# Altium PCB USB2.0_HUB.PcbDoc (part 2 of 2)
Units mm, origin at the board's own origin, x right, y up, seen from the top; angles counter-clockwise.
Board outline 91.95 x 55.97 mm, 4 copper layers (Top Layer, Layer 1, Layer 2, Bottom Layer), stack 1.544 mm thick; 125 components, 88 nets, 457 pads, 299 vias.
Unrouted connection lines stored in the file: 120.
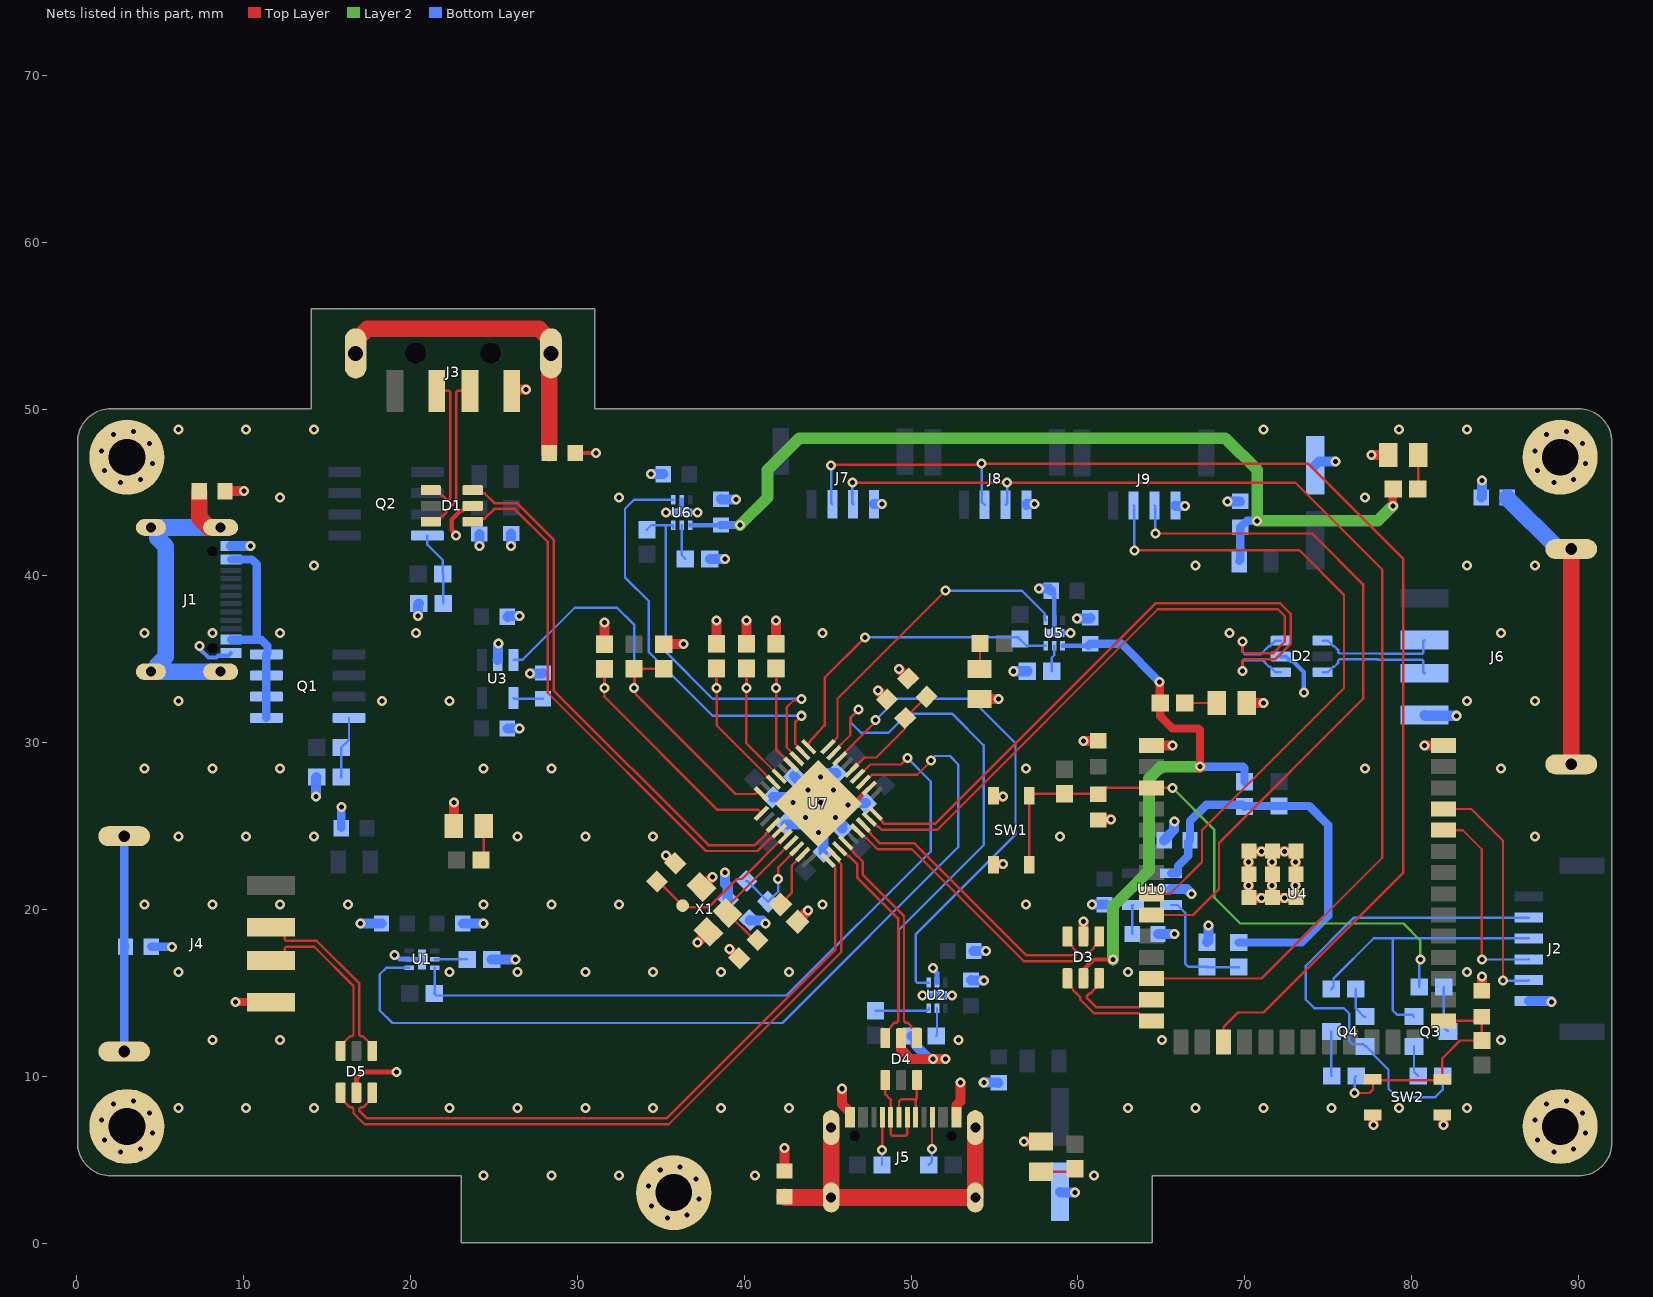
[diagram p4: the nets of this part, all layers, seen from the top]

## Via types
v1: diameter 0.6, hole 0.3, Top Layer to Bottom Layer, tented both sides, 259 vias
v2: diameter 0.6, hole 0.3, Top Layer to Bottom Layer, 40 vias

## Nets (pads, with @x,y where several pads share a name; then routed paths per layer and width w, separated by ;. In a path a pad name is that pad's centre, name@x,y a point inside that pad or via, vN(x,y) a via of type N, cw(c..) or ccw(c..) an arc to the next point about the centre after c; other vN are vias at no path point) (continued)
"+5V PORT3": C13.2 D3.5 R31.1 R45.2 U5.1 | length 35.1
  Top Layer w0.254: D3.5@60.37,15.935 60.37,16.428 60.96,17.018 v1(62.103,17.018)
  Top Layer w0.5: D3.5@60.325,15.89 D3.5@60.37,15.935 ; v1(64.897,33.655) 64.897,32.412 R45.2@64.924,32.385 64.924,31.596 65.659,30.861 67.226,30.861 67.31,30.777 v1@67.31,28.448
  Layer 2 w0.7: v1(62.103,17.018) 62.103,20.193 64.262,22.352 64.262,27.862 64.975,28.575 v1(67.31,28.575)
  Bottom Layer w0.254: U5.1@59.08,35.814 C13.2@60.62,35.814
  Bottom Layer w0.5: C13.2@60.62,35.814 C13.2@60.747,35.941 62.611,35.941 v1(64.897,33.655) ; v1(67.31,28.575) 69.893,28.575 69.977,28.491 R31.1@69.977,27.659
"+5V PORT4": C14.2 C34.2 FB2.1 R46.2 U6.1 | length 53.7
  Top Layer w0.5: v1(78.867,44.196) 78.867,45.185 R46.2@78.894,45.212
  Layer 2 w0.7: v1(39.751,43.053) 41.402,44.704 41.402,46.355 43.307,48.26 68.834,48.26 70.739,46.355 v1(70.739,43.307) 77.978,43.307 v1(78.867,44.196)
  Bottom Layer w0.254: U6.1@36.759,43.036 C14.2@38.591,43.036
  Bottom Layer w0.5: C14.2@38.591,43.036 C14.2@38.608,43.053 v1(39.751,43.053) ; FB2.1@69.657,40.894 69.723,40.96 C34.2@69.723,42.926 69.753,42.926 70.134,43.307 v1(70.739,43.307)
"+5V VBUS_EXT": J1.A4_B9 J1.B4_A9 Q1.5 Q1.6 Q1.7 Q1.8 | length 12.9
  Bottom Layer w0.5: J1.A4_B9@9.248,36.187 10.795,36.187 ; J1.B4_A9@9.248,40.987 10.502,40.987 10.795,40.694 10.795,36.187 ; Q1.5@11.368,31.496 Q1.6@11.368,32.766 Q1.7@11.368,34.036 Q1.8@11.368,35.306 11.43,35.368 11.43,35.814 11.057,36.187 10.795,36.187
BYP: C9.2 U3.4 | length 1.8
  Bottom Layer w0.143: U3.4@26.18,32.687 26.228,32.639 C9.2@27.94,32.639
"BYP ESP1": C40.2 U10.4 | length 1.8
  Bottom Layer w0.143: C40.2@63.246,18.542 63.246,20.231 U10.4@63.3,20.285
"EN ESP1": R34.1 R36.2 U10.3 | length 7.4
  Bottom Layer w0.143: U10.3@65.59,20.285 65.955,20.285 66.421,19.819 66.421,16.764 66.595,16.59 R36.2@67.732,16.59 67.759,16.563 R34.1@69.637,16.563
ESP1_DTR: J2.2 Q4.2 R16.2 | length 29.8
  Bottom Layer w0.143: Q4.2@77.214,11.811 77.087,11.938 76.454,11.938 76.263,12.129 76.263,13.78 75.946,14.097 74.168,14.097 73.66,14.605 73.66,16.637 76.551,19.528 J2.2@87.017,19.528 ; Q4.2@77.278,11.811 77.715,11.374 77.715,11.311 78.613,10.412 78.613,9.271 79.121,8.763 81.407,8.763 81.861,9.217 R16.2@81.861,10.033
ESP1_EN: C8.2 R3.1 R14.2 SW1.3 SW1.4 U4.3 | length 36.8
  Top Layer w0.143: SW1.3@57.082,22.69 SW1.4@57.082,26.84 57.193,26.951 R3.1@59.182,26.951 61.187,26.951 C8.2@61.214,26.924 61.595,27.305 U4.3@64.415,27.305 v1(65.659,27.305)
  Layer 2 w0.143: v1(65.659,27.305) 68.179,24.785 68.179,20.721 69.723,19.177 79.502,19.177 80.518,18.161 v1(80.518,17.018)
  Bottom Layer w0.143: R14.2@80.445,15.367 80.445,16.945 v1(80.518,17.018)
ESP1_IO0: C10.2 R9.1 R19.2 SW2.3 SW2.4 U4.27 | length 14.9
  Top Layer w0.143: v1(76.581,9.017) 77.47,9.017 77.681,9.228 SW2.4@77.681,9.838 77.919,9.838 77.978,9.779 81.772,9.779 SW2.3@81.831,9.838 81.831,11.092 82.904,12.165 R9.1@84.201,12.165 C10.2@84.201,13.589 83.947,13.335 U4.27@81.915,13.335
  Bottom Layer w0.143: v1(76.581,9.017) 76.581,9.933 R19.2@76.681,10.033
ESP1_RTS: J2.3 Q3.2 R18.2 | length 19.1
  Bottom Layer w0.143: R18.2@75.184,15.24 75.316,15.372 75.316,15.88 77.724,18.288 78.867,18.288 ; Q3.2@80.139,13.589 80.012,13.716 79.121,13.716 78.867,13.97 78.867,18.288 ; J2.3@87.017,18.278 87.007,18.288 78.867,18.288
ESP1_RX: J2.4 U4.36 | length 12.2
  Top Layer w0.143: U4.36@81.915,24.765 83.058,24.765 84.201,23.622 v1(84.201,17.018)
  Bottom Layer w0.143: v1(84.201,17.018) 87.007,17.018 J2.4@87.017,17.028
ESP1_SCL: J7.2 J8.2 U4.17 | length 75.9
  Top Layer w0.143: v1(45.212,46.609) 45.276,46.672 54.165,46.672 v1(54.229,46.736) 73.787,46.736 79.502,41.021 79.502,22.225 71.12,13.843 69.596,13.843 68.72,12.967 U4.17@68.72,12.085
  Bottom Layer w0.143: v1(45.212,46.609) 45.212,44.373 J7.2@45.283,44.302 ; v1(54.229,46.736) 54.229,44.442 J8.2@54.412,44.259
ESP1_SDA: J7.3 J8.3 U4.12 | length 70.7
  Top Layer w0.143: v1(46.482,45.593) v1(55.753,45.593) 73.025,45.593 78.232,40.386 78.232,23.114 70.993,15.875 U4.12@64.415,15.875
  Bottom Layer w0.143: v1(46.482,45.593) 46.482,44.353 J7.3@46.533,44.302 ; J8.3@55.662,44.259 55.753,44.351 v1(55.753,45.593)
ESP1_TX: J2.5 U4.37 | length 14.3
  Top Layer w0.143: U4.37@81.915,26.035 83.566,26.035 85.471,24.13 v1(85.471,15.748)
  Bottom Layer w0.143: v1(85.471,15.748) 86.987,15.748 J2.5@87.017,15.778
GND: C1.1 C2.1 C3.1 C4.1 C5.1 C6.1 C7.1 C8.1 C9.1 C10.1 C11.1 C12.1 C13.1 C14.1 C15.1 C16.1 C17.1 C18.1 C19.1 C20.1 C21.1 C22.1 C23.1 C24.1 C25.1 C26.1 C27.1 C28.1 C29.1 C31.1 C32.2 C33.2 C34.1 C35.2 C36.1 C37.1 C38.1 C40.1 C43.2 C44.1 C45.1 C46.1 D1.2 D2.2 D3.2 D4.2 D5.2 D6.C D7.C D8.C D9.C D10.C J1.A1_B12 J1.B1_A12 J2.6 J3.4 J4.4 J5.A1_B12 J5.B1_A12 J6.4 J7.4 J8.4 J9.4 M1.1 M2.1 M3.1 M4.1 M5.1 R6.1 R7.1 R8.1 R12.1 R13.1 R17.1 R20.1 R21.1 R22.1 R23.1 R24.2 R26.1 R36.1 SW1.1 SW1.2 SW2.1 SW2.2 U1.5 U1.7 U2.5 U2.7 U3.2 U4.1 U4.40 U4.41_1 U4.41_2 U4.41_3 U4.41_4 U4.41_5 U4.41_6 U4.41_7 U4.41_8 U4.41_9 U5.5 U5.7 U6.5 U6.7 U7.11 U7.37 U10.2 X1.2 X1.4 | length 127.4
  Top Layer w0.254: v1(22.733,42.418) 22.733,42.512 22.479,42.766 22.479,43.387 23.014,43.922 23.15,43.922 23.297,44.069 23.622,44.069 23.734,44.181 D1.2@23.734,44.196 ; C35.2@29.871,47.371 v1(31.115,47.371) ; v1(46.228,26.289) 46.495,26.289 U7.11@47.496,27.29
  Top Layer w0.3: D5.2@16.764,9.032 16.764,9.906 17.145,10.287 v1(19.177,10.287)
  Top Layer w0.5: v1(9.525,14.478) 9.537,14.466 11.622,14.466 J4.4@11.634,14.454
  Top Layer w0.6: C33.2@8.89,45.085 v1(10.033,45.085) ; D6.C@22.595,25.019 22.606,25.03 v1(22.606,26.416) ; J3.4@26.07,51.09 26.161,51.181 v1(26.924,51.181) ; R22.1@31.623,35.914 v1(31.623,37.211) ; R26.1@35.179,35.914 v1(36.349,35.914) ; v1(35.306,23.241) 35.765,22.782 C17.1@35.863,22.782 ; v1(37.211,18.034) X1.2@37.857,18.68 ; X1.4@37.433,21.368 37.497,21.368 v1(38.1,21.971) ; R21.1@38.354,35.941 v1(38.354,37.338) ; v1(39.116,17.653) 39.673,17.096 C18.1@39.702,17.096 ; R20.1@40.132,35.941 v1(40.132,37.338) ; R23.1@41.91,35.941 v1(41.91,37.338) ; C45.1@42.418,4.344 v1(42.418,5.715) ; R24.2@43.203,19.281 43.203,19.327 v1(43.815,19.939) ; v1(45.847,9.271) 45.847,8.358 46.328,7.877 J5.A1_B12@46.328,7.557 ; v1(48.006,33.147) C22.1@48.561,32.592 ; v1(49.276,34.417) C21.1@49.831,33.862 ; D4.2@49.408,12.299 49.408,11.609 49.968,11.049 v1(51.308,11.049) v1(52.07,11.049) ; J5.B1_A12@52.728,7.557 52.728,8.29 52.959,8.521 v1(52.959,9.652) ; D10.C@54.102,32.628 54.113,32.639 v1(55.245,32.639) ; SW1.1@54.932,22.69 54.932,22.708 54.957,22.733 v1(55.499,22.733) ; SW1.2@54.932,26.84 54.932,26.822 54.957,26.797 v1(55.499,26.797) ; v1(56.769,6.096) 57.774,6.096 D7.C@57.785,6.107 ; D3.2@60.325,18.4 v1(60.325,19.304) ; v1(60.325,30.099) 61.188,30.099 C4.1@61.214,30.125 ; C8.1@61.214,25.374 61.24,25.4 v1(61.976,25.4) ; U4.1@64.415,29.845 v1(65.659,29.845) ; D8.C@70.115,32.385 v1(71.12,32.385) ; U4.41_1@70.265,23.525 U4.41_1@70.295,23.495 ; U4.41_5@71.628,22.162 v1(71.628,22.86) 71.628,23.458 U4.41_2@71.665,23.495 ; U4.41_8@71.665,20.725 71.628,20.762 v1(71.628,21.463) 71.628,22.088 U4.41_5@71.665,22.125 ; v1(73.025,21.463) v1(73.025,22.86) 73.025,23.485 U4.41_3@73.065,23.525 73.035,23.495 v1(72.39,23.495) U4.41_2@71.665,23.495 ; U4.41_9@73.041,20.701 v1(72.39,20.701) v1(70.993,20.701) 70.289,20.701 U4.41_7@70.265,20.725 70.231,20.759 v1(70.231,21.463) v1(70.231,22.86) 70.231,23.431 U4.41_1@70.295,23.495 ; v1(77.597,47.244) D9.C@78.602,47.244 ; SW2.2@77.681,7.688 77.699,7.688 77.724,7.663 v1(77.724,7.112) ; v1(80.772,29.845) U4.40@81.915,29.845 ; SW2.1@81.831,7.688 81.89,7.688 81.915,7.663 v1(81.915,7.112) ; C10.1@84.201,15.139 v1(84.201,16.002) ; U4.41_1@70.295,23.495 v1(70.993,23.495) U4.41_2@71.665,23.495
  Bottom Layer w0.254: v1(7.366,35.814) 7.394,35.786 7.394,35.612 7.891,35.115 8.365,35.115 8.464,35.214 9.075,35.214 J1.A1_B12@9.248,35.387 ; U6.7@36.259,43.803 U6.5@36.259,44.571 ; v1@37.205,43.809 v1(37.211,43.815) ; C11.1@58.394,39.116 58.58,38.93 U5.5@58.58,37.349 U5.7@58.58,36.582 58.583,36.579 59.56,36.579 v1(59.563,36.576) ; D2.2@72.151,35.179 72.461,35.179 72.735,34.905 72.871,34.905 73.533,34.243 v1(73.533,33.02)
  Bottom Layer w0.3: v1(19.05,17.272) 19.131,17.272 19.367,17.036 19.918,17.036 U1.5@19.928,17.026 U1.7@20.695,17.026 ; v1(35.306,43.815) 35.312,43.809 36.253,43.809 U6.7@36.259,43.803 ; U6.7@36.265,43.809 v1@37.205,43.809 ; v1(50.673,14.859) 50.679,14.865 U2.7@51.554,14.865 52.445,14.865 v1(52.451,14.859) ; v1(51.308,16.51) 51.308,16.429 51.544,16.193 51.544,15.642 U2.5@51.554,15.632
  Bottom Layer w0.5: C38.1@4.471,17.78 v1(5.715,17.78) ; C31.1@15.849,24.892 15.849,26.136 v1(15.875,26.162)
  Bottom Layer w0.6: J1.B1_A12@9.248,41.787 v1(10.41,41.787) v1@10.414,41.783 ; v1(14.351,26.797) 14.351,27.913 R7.1@14.378,27.94 ; v1(17.018,19.177) C1.1@18.262,19.177 ; v1(20.447,37.592) 20.447,38.3 R17.1@20.501,38.354 ; C3.1@23.14,19.177 v1(24.384,19.177) ; v1(24.13,41.783) C15.1@24.13,42.519 ; R6.1@24.865,17.018 v1(26.289,17.018) ; U3.2@25.23,34.977 25.235,34.982 25.235,35.903 v1(25.273,35.941) ; C7.1@25.807,30.861 v1(26.543,30.861) ; C6.1@25.807,37.547 25.852,37.592 v1(26.543,37.592) ; v1(26.035,41.783) C16.1@26.035,42.545 ; v1(27.178,34.163) 27.914,34.163 C9.1@27.94,34.189 ; v1(34.417,46.101) C12.1@35.153,46.101 ; R13.1@37.946,41.021 v1(38.862,41.021) ; C14.1@38.608,44.603 38.634,44.577 v1(39.497,44.577) ; v1(38.862,22.225) 38.862,21.553 39.015,21.4 39.015,20.642 C20.1@39.036,20.621 ; C19.1@40.337,19.382 40.358,19.361 41.091,19.361 v1(41.275,19.177) ; C28.1@41.712,26.734 41.733,26.755 42.587,26.755 v1(42.926,26.416) ; C24.1@42.474,25.116 42.495,25.095 42.721,25.095 42.742,25.116 43.277,25.116 v1(43.688,25.527) ; C25.1@42.982,28.004 42.989,28.004 v1(43.815,27.178) ; v1(44.45,24.638) 44.739,24.349 44.739,23.486 C23.1@44.76,23.465 ; v1(44.577,27.94) 44.82,28.183 45.498,28.183 C29.1@45.52,28.162 ; v1(45.466,25.527) 45.887,25.106 45.887,24.88 C27.1@45.87,24.862 ; v1(46.228,26.289) 46.344,26.405 47.276,26.405 C26.1@47.298,26.384 ; J7.4@47.783,44.302 47.783,44.323 v1(48.26,44.323) ; R8.1@50.038,12.446 50.048,12.446 50.258,12.236 50.258,11.883 51.092,11.049 v1(51.308,11.049) ; C5.1@53.594,15.785 53.631,15.748 v1(54.356,15.748) ; C2.1@53.747,17.526 v1(54.483,17.526) ; v1(54.356,9.652) 55.219,9.652 C44.1@55.245,9.626 ; v1(56.134,34.29) R12.1@56.964,34.29 ; J8.4@56.912,44.259 56.912,44.323 v1(57.404,44.323) ; v1(57.658,39.243) 58.267,39.243 C11.1@58.394,39.116 ; C43.2@58.928,3.089 58.969,3.048 v1(59.817,3.048) ; v1(59.944,37.465) 60.721,37.465 C13.1@60.747,37.491 ; v1(60.833,20.32) C37.1@61.722,20.32 ; C40.1@64.796,18.542 v1(65.786,18.542) ; C36.1@65.166,24.156 65.326,24.316 65.326,24.346 65.756,24.776 65.756,25.243 v1(65.786,25.273) ; U10.2@65.59,21.235 65.595,21.23 66.527,21.23 v1(66.802,20.955) ; J9.4@65.841,44.221 65.841,44.196 v1(66.421,44.196) ; R36.1@67.732,18.06 67.818,18.146 v1(67.818,19.05) ; v1(68.961,44.45) 69.697,44.45 C34.1@69.723,44.476 ; C32.2@74.211,46.627 74.447,46.863 v1(75.438,46.863) ; J6.4@80.772,31.663 80.812,31.623 v1(82.677,31.623) ; C46.1@84.175,44.704 84.201,44.73 v1(84.201,45.72) ; J2.6@87.017,14.528 88.342,14.528 v1(88.392,14.478)
  other v1: 24.384,4.064 28.448,4.064 32.512,4.064 40.64,4.064 60.96,4.064 6.096,8.128 10.16,8.128 14.224,8.128 22.352,8.128 26.416,8.128 30.48,8.128 34.544,8.128 38.608,8.128 42.672,8.128 62.992,8.128 67.056,8.128 71.12,8.128 75.184,8.128 79.248,8.128 83.312,8.128 8.128,12.192 12.192,12.192 52.832,12.192 65.024,12.192 85.344,12.192 6.096,16.256 22.352,16.256 26.416,16.256 30.48,16.256 34.544,16.256 38.608,16.256 42.672,16.256 62.992,16.256 83.312,16.256 4.064,20.32 8.128,20.32 12.192,20.32 16.256,20.32 24.384,20.32 28.448,20.32 32.512,20.32 44.704,20.32 56.896,20.32 6.096,24.384 10.16,24.384 14.224,24.384 26.416,24.384 30.48,24.384 34.544,24.384 58.928,24.384 87.376,24.384 44.577,26.416 45.339,27.178 4.064,28.448 8.128,28.448 12.192,28.448 24.384,28.448 28.448,28.448 56.896,28.448 77.216,28.448 85.344,28.448 6.096,32.512 18.288,32.512 22.352,32.512 83.312,32.512 87.376,32.512 4.064,36.576 8.128,36.576 12.192,36.576 20.32,36.576 44.704,36.576 69.088,36.576 85.344,36.576 14.224,40.64 67.056,40.64 83.312,40.64 87.376,40.64 12.192,44.704 32.512,44.704 77.216,44.704 6.096,48.768 10.16,48.768 14.224,48.768 71.12,48.768 79.248,48.768 83.312,48.768
  other v2: 35.397,1.528 36.586,1.705 34.431,2.244 37.302,2.671 34.254,3.433 37.125,3.86 34.97,4.399 36.159,4.576 2.629,5.486 88.519,5.486 3.818,5.663 89.708,5.663 1.663,6.202 87.553,6.202 4.534,6.629 90.424,6.629 1.486,7.391 87.376,7.391 4.357,7.818 90.247,7.818 2.202,8.357 88.092,8.357 3.391,8.534 89.281,8.534 2.629,45.597 88.519,45.597 3.818,45.774 89.708,45.774 1.663,46.313 87.553,46.313 4.534,46.74 90.424,46.74 1.486,47.502 87.376,47.502 4.357,47.929 90.247,47.929 2.202,48.468 88.092,48.468 3.391,48.645 89.281,48.645
NetD6_A: D6.A R43.1 | length 2.1
  Top Layer w0.143: R43.1@24.23,22.987 24.395,23.152 D6.A@24.395,25.019
NetD7_A: D7.A R44.1 | length 2.1
  Top Layer w0.143: D7.A@57.785,4.307 59.652,4.307 R44.1@59.817,4.472
NetD8_A: D8.A R45.1 | length 1.9
  Top Layer w0.143: R45.1@66.394,32.385 D8.A@68.315,32.385
NetD9_A: D9.A R46.1 | length 2
  Top Layer w0.143: R46.1@80.364,45.212 80.402,45.25 D9.A@80.402,47.244
NetD10_A: D10.A R5.1 | length 1.5
  Top Layer w0.143: D10.A@54.102,34.428 54.129,34.455 R5.1@54.129,35.941
NetJ5_A5: J5.A5 R42.1 | length 2.9
  Top Layer w0.143: v1(48.26,5.588) 48.278,5.606 J5.A5@48.278,7.557
  Bottom Layer w0.143: R42.1@48.26,4.699 v1(48.26,5.588)
NetJ5_B5: J5.B5 R41.1 | length 3
  Top Layer w0.143: v1(51.253,5.66) 51.253,7.532 J5.B5@51.278,7.557
  Bottom Layer w0.143: R41.1@51.054,4.699 51.244,4.889 51.244,5.651 v1(51.253,5.66)
NetQ1_4: Q1.4 R1.1 R7.2 | length 3.8
  Bottom Layer w0.143: R7.2@15.848,27.94 R1.1@15.848,29.718 15.858,29.718 16.318,30.178 Q1.4@16.318,31.496
NetQ2_4: Q2.4 R15.1 R17.2 | length 4.5
  Bottom Layer w0.143: Q2.4@21.017,42.418 21.017,41.867 21.944,40.94 R15.1@21.944,40.132 21.971,40.105 R17.2@21.971,38.354
NetQ3_1: Q3.1 R16.1 | length 1.9
  Bottom Layer w0.143: Q3.1@80.139,11.811 80.139,10.285 R16.1@80.391,10.033
NetQ3_3: Q3.3 R14.1 | length 2.8
  Bottom Layer w0.143: R14.1@81.915,15.367 81.915,12.956 Q3.3@82.171,12.7
NetQ4_1: Q4.1 R18.1 | length 1.9
  Bottom Layer w0.143: R18.1@76.654,15.24 76.654,14.086 77.151,13.589 Q4.1@77.214,13.589
NetQ4_3: Q4.3 R19.1 | length 2.7
  Bottom Layer w0.143: Q4.3@75.182,12.7 75.182,10.062 R19.1@75.211,10.033
PORT1_ILIM: R6.2 U1.2 | length 1.9
  Bottom Layer w0.143: U1.2@21.463,17.026 23.387,17.026 R6.2@23.395,17.018
PORT2_ILIM: R8.2 U2.2 | length 1.7
  Bottom Layer w0.143: R8.2@51.508,12.446 51.554,12.492 U2.2@51.554,14.097
PORT3_ILIM: R12.2 U5.2 | length 1.6
  Bottom Layer w0.143: R12.2@58.434,34.29 58.434,35.105 58.58,35.251 U5.2@58.58,35.814
PORT4_ILIM: R13.2 U6.2 | length 2.1
  Bottom Layer w0.143: U6.2@36.259,43.036 36.259,41.238 R13.2@36.476,41.021
S_AN: J9.3 U4.9 | length 41.9
  Top Layer w0.143: U4.9@64.415,19.685 66.905,19.685 68.453,21.233 68.453,24.003 77.089,32.639 77.089,39.497 74.041,42.545 v1(64.643,42.545)
  Bottom Layer w0.143: J9.3@64.591,44.221 64.643,44.169 v1(64.643,42.545)
S_EN: J9.2 U4.8 | length 39.7
  Top Layer w0.143: v1(63.383,41.539) 73.269,41.539 75.946,38.862 75.946,33.274 67.437,24.765 67.437,22.86 65.532,20.955 U4.8@64.415,20.955
  Bottom Layer w0.143: J9.2@63.341,44.221 63.383,44.179 v1(63.383,41.539)
SH1_GND: C33.1 J1.SH1 J1.SH2 J1.SH3 J1.SH4 | length 21.3
  Top Layer w1: C33.1@7.34,45.085 7.34,43.493 7.926,42.907 J1.SH2@8.628,42.907
  Bottom Layer w1: J1.SH1@8.628,34.267 J1.SH3@4.448,34.267 4.848,34.267 4.848,34.667 5.334,35.153 5.334,41.783 4.848,42.269 J1.SH4@4.848,42.907 ; J1.SH2@8.628,42.907 J1.SH4@4.848,42.907 ; J1.SH4@4.848,42.907 J1.SH4@4.448,42.907 J1.SH4@4.848,42.907
SH2_GND: C35.1 J3.5 | length 19.1
  Top Layer w1: J3.5@16.72,53.34 16.72,54.109 17.424,54.813 27.716,54.813 J3.5@28.42,54.109 ; C35.1@28.321,47.371 28.321,52.179 28.363,52.221 28.363,53.283 J3.5@28.42,53.34
SH3_GND: C45.2 J5.SH1 J5.SH2 J5.SH3 J5.SH4 | length 19.8
  Top Layer w1: C45.2@42.418,2.794 42.455,2.757 J5.SH3@45.208,2.757 ; J5.SH1@45.208,6.937 J5.SH3@45.208,2.757 ; J5.SH2@53.848,6.937 J5.SH4@53.848,2.757 J5.SH3@45.208,2.757
SH4_GND: C46.2 J6.5 J6.6 | length 18
  Top Layer w1: J6.6@89.562,28.713 J6.5@89.562,41.613
  Bottom Layer w1: C46.2@85.725,44.704 85.725,44.674 88.786,41.613 J6.5@89.562,41.613
SH12_GND: C38.2 J4.5 J4.6 | length 13
  Bottom Layer w0.5: J4.6@2.844,11.504 2.844,17.703 C38.2@2.921,17.78 2.844,17.857 J4.5@2.844,24.404
USB_HOST_A_D_N: D1.4 J3.2 | length 8.7
  Top Layer w0.147: D1.4@21.224,45.146 21.534,45.146 21.862,44.818 21.921,44.818 22.187,44.552 22.309,44.552 22.395,44.638 22.395,46.104 22.395,51.004 22.309,51.09 J3.2@21.57,51.09
USB_HOST_A_D_P: D1.6 J3.3 | length 9.5
  Top Layer w0.147: D1.6@21.224,43.246 21.534,43.246 21.862,43.574 21.921,43.574 22.156,43.809 22.156,43.981 22.378,44.202 22.454,44.202 22.745,44.494 22.745,46.249 22.745,51.004 22.831,51.09 J3.3@23.57,51.09
USB_HOST_D_N: D1.3 U7.30 | length 32.7
  Top Layer w0.147: D1.3@23.734,45.146 23.922,44.958 24.444,44.958 25.031,44.371 26.386,44.371 28.575,42.182 28.575,33.147 37.852,23.87 40.646,23.87 41.3,24.523 41.3,24.569 41.747,25.016 U7.30@41.747,25.076
USB_HOST_D_P: D1.1 U7.31 | length 33
  Top Layer w0.147: D1.1@23.734,43.246 23.922,43.434 24.444,43.434 25.031,44.021 26.241,44.021 28.225,42.037 28.225,33.002 37.707,23.52 40.791,23.52 41.547,24.275 41.593,24.275 42.041,24.723 U7.31@42.101,24.723
USB_HUB1_D_N: D5.3 U7.1 | length 40
  Top Layer w0.147: D5.3@17.714,9.032 17.714,8.722 17.146,8.154 17.025,8.154 16.939,8.068 16.939,7.946 17.392,7.493 35.337,7.493 45.465,17.621 45.465,22.499 45.101,22.863 45.101,22.955 U7.1@45.021,22.955
USB_HUB1_D_P: D5.1 U7.2 | length 41.4
  Top Layer w0.147: D5.1@15.814,9.032 15.814,8.722 16.382,8.154 16.503,8.154 16.589,8.068 16.589,7.801 17.247,7.143 35.482,7.143 45.815,17.476 45.815,22.732 45.712,22.834 45.712,22.891 45.375,23.229 U7.2@45.375,23.309
USB_HUB2_D_N: D4.3 U7.3 | length 13.3
  Top Layer w0.147: U7.3@45.728,23.662 45.788,23.662 46.236,23.215 46.282,23.215 46.767,22.73 46.767,21.94 49.228,19.479 49.228,13.322 49.142,13.236 49.016,13.236 48.781,13.001 48.781,12.942 48.453,12.614 D4.3@48.453,12.304
USB_HUB2_D_P: D4.1 U7.4 | length 13.6
  Top Layer w0.147: U7.4@46.082,24.016 46.082,23.956 46.529,23.508 46.529,23.462 47.117,22.875 47.117,22.085 49.578,19.624 49.578,13.322 49.664,13.236 49.79,13.236 50.025,13.001 50.025,12.942 50.353,12.614 D4.1@50.353,12.304
USB_HUB3_D_N: D3.1 U7.6 | length 18.6
  Top Layer w0.147: U7.6@46.789,24.723 46.849,24.723 47.297,24.275 47.343,24.275 47.996,23.622 50.051,23.622 56.763,16.91 59.997,16.91 60.288,17.201 60.288,17.243 60.427,17.382 60.5,17.382 60.586,17.468 60.712,17.468 60.947,17.703 60.947,17.762 61.275,18.09 D3.1@61.275,18.4
USB_HUB3_D_P: D3.3 U7.7 | length 17.4
  Top Layer w0.147: U7.7@47.142,25.076 47.142,25.016 47.59,24.569 47.59,24.523 48.141,23.972 50.196,23.972 56.908,17.26 59.852,17.26 59.938,17.346 59.938,17.468 59.703,17.703 59.703,17.762 59.375,18.09 D3.3@59.375,18.4
USB_HUB4_D_N: D2.3 U7.8 | length 39.1
  Top Layer w0.147: U7.8@47.496,25.43 47.556,25.43 48.004,24.982 48.05,24.982 48.238,24.794 51.573,24.794 64.783,38.004 71.978,38.004 72.39,37.592 72.39,36.068 71.686,35.364 69.946,35.364 69.85,35.459 v1(69.85,36.068)
  Bottom Layer w0.147: v1(69.85,36.068) 69.85,35.459 70.003,35.306 70.427,35.306 70.958,35.306 71.454,35.801 71.513,35.801 71.841,36.129 D2.3@72.151,36.129
USB_HUB4_D_P: D2.1 U7.9 | length 39.9
  Top Layer w0.147: U7.9@47.85,25.784 47.85,25.723 48.297,25.276 48.297,25.23 48.383,25.144 51.428,25.144 64.638,38.354 72.123,38.354 72.74,37.737 72.74,35.923 71.831,35.014 69.946,35.014 69.86,34.928 69.86,34.319 v1(69.869,34.309)
  Bottom Layer w0.147: v1(69.869,34.309) 69.86,34.319 69.86,34.87 69.946,34.956 70.282,34.956 71.054,34.956 71.454,34.557 71.513,34.557 71.841,34.229 D2.1@72.151,34.229
USB_HUB_CRFILT: C21.2 C22.2 U7.14 | length 6.7
  Top Layer w0.143: U7.14@46.435,28.35 47.203,29.118 47.914,29.118 49.636,30.84 49.636,31.475 C21.2@50.927,32.766
USB_HUB_HS_IND: R21.2 R48.1 U7.25 | length 9.4
  Top Layer w0.143: R21.2@38.354,34.471 v1(38.354,33.274) 38.354,31.036 U7.25@41.747,27.643
  Bottom Layer w0.143: v1(38.354,33.274) R48.1@38.354,34.444
USB_HUB_NOCS1: R2.1 U1.3 U7.13 | length 44.5
  Top Layer w0.143: U7.13@46.789,27.997 46.852,27.997 47.557,28.702 49.399,28.702 49.78,29.083 v1(49.784,29.083)
  Bottom Layer w0.143: U1.3@21.463,16.526 21.463,15.013 R2.1@21.436,14.986 21.563,14.859 42.545,14.859 51.181,23.495 51.181,27.686 v1(49.784,29.083)
USB_HUB_NOCS2: R4.1 U2.3 U7.17 | length 35
  Top Layer w0.143: U7.17@45.375,29.411 45.375,29.474 46.355,30.455 46.355,31.496 v1(46.863,32.004)
  Bottom Layer w0.143: v1(46.863,32.004) 46.355,31.496 46.355,31.242 46.99,30.607 48.641,30.607 49.784,31.75 52.451,31.75 54.356,29.845 54.356,23.876 49.276,18.796 49.276,13.943 ; R4.1@47.879,13.943 49.276,13.943 ; U2.3@51.054,14.097 51.054,14.012 50.985,13.943 49.276,13.943
USB_HUB_NOCS3: R10.1 U5.3 U7.19 | length 19
  Top Layer w0.143: U7.19@43.869,29.765 43.864,29.852 43.86,29.938 43.86,29.997 44.794,31.03 44.831,31.071 44.831,33.909 v1(47.244,36.322)
  Bottom Layer w0.143: v1(47.244,36.322) 56.415,36.322 56.923,35.814 U5.3@58.08,35.814
USB_HUB_NOCS4: R11.1 U6.3 U7.21 | length 23.2
  Top Layer w0.143: U7.21@43.161,29.057 43.161,29.121 42.545,29.737 42.545,32.131 42.966,32.552 43.347,32.552 v1(43.434,32.639)
  Bottom Layer w0.143: R11.1@34.163,42.772 34.427,43.036 35.306,43.036 ; U6.3@35.759,42.883 U6.3@35.759,43.036 35.306,43.036 ; v1(43.434,32.639) 38.105,32.639 35.306,35.438 35.306,43.036
USB_HUB_PLLFILT: C19.2 C20.2 U7.34 | length 5.7
  Top Layer w0.143: v1(42.037,21.844) 42.037,22.538 U7.34@43.161,23.662
  Bottom Layer w0.143: C20.2@40.132,21.717 40.194,21.717 C19.2@41.433,20.478 42.037,21.082 v1(42.037,21.844)
USB_HUB_PRTPWR1: U1.4 U7.12 | length 55
  Top Layer w0.143: U7.12@47.142,27.643 47.206,27.643 47.651,28.089 50.369,28.089 51.181,28.9 v1(51.181,28.956)
  Bottom Layer w0.143: U1.4@19.928,16.526 18.558,16.526 18.161,16.129 18.161,13.97 18.923,13.208 42.291,13.208 52.832,23.749 52.832,28.702 52.324,29.21 51.435,29.21 v1(51.181,28.956)
USB_HUB_PRTPWR2: U2.4 U7.16 | length 30.8
  Top Layer w0.143: U7.16@45.728,29.057 45.728,29.121 47.879,31.271 v1(47.879,31.369)
  Bottom Layer w0.143: v1(47.879,31.369) 49.149,32.639 53.594,32.639 56.261,29.972 56.261,24.511 50.292,18.542 50.292,15.705 50.376,15.621 51.043,15.621 U2.4@51.054,15.632
USB_HUB_PRTPWR3: U5.4 U7.18 | length 19.2
  Top Layer w0.143: U7.18@45.021,29.765 45.593,30.336 45.593,32.639 v1(52.07,39.116)
  Bottom Layer w0.143: v1(52.07,39.116) 56.642,39.116 58.02,37.738 58.02,37.409 U5.4@58.08,37.349
USB_HUB_PRTPWR4: U6.4 U7.20 | length 25.6
  Top Layer w0.143: v1(43.434,31.623) 43.069,31.258 43.069,29.92 43.515,29.474 U7.20@43.515,29.411
  Bottom Layer w0.143: U6.4@35.759,44.571 33.395,44.571 32.855,44.031 32.855,39.916 34.29,38.481 34.29,35.433 38.1,31.623 v1(43.434,31.623)
USB_HUB_RBIAS: R24.1 U7.35 | length 3.5
  Top Layer w0.143: R24.1@42.164,20.32 42.845,21.001 42.845,22.638 U7.35@43.515,23.309
USB_HUB_SCL: R20.2 R47.1 U7.24 | length 8.5
  Top Layer w0.143: R20.2@40.132,34.471 40.132,29.966 U7.24@42.101,27.997
  Bottom Layer w0.143: v1(40.132,33.274) R47.1@40.132,34.444
USB_HUB_SDA: R23.2 R50.1 U7.22 | length 7.3
  Top Layer w0.143: R23.2@41.91,34.471 41.91,29.602 U7.22@42.808,28.704
  Bottom Layer w0.143: v1(41.91,33.274) R50.1@41.91,34.444
USB_HUB_SUSP_IND: R22.2 R49.1 U7.28 | length 15.2
  Top Layer w0.143: R22.2@31.623,34.444 v1(31.623,33.274) 31.623,32.766 38.407,25.982 40.841,25.982 U7.28@41.04,25.784
  Bottom Layer w0.143: v1(31.623,33.274) R49.1@31.623,34.444
USB_HUB_XTALIN: C18.2 U7.33 X1.3 | length 8.3
  Top Layer w0.143: C18.2@40.798,18.192 40.609,18.192 X1.3@38.989,19.812 38.989,20.197 U7.33@42.808,24.016
USB_HUB_XTALOUT: C17.2 U7.32 X1.1 | length 10.1
  Top Layer w0.143: C17.2@34.767,21.686 34.867,21.686 X1.1@36.309,20.244 ; X1.1@36.206,20.141 37.868,20.141 39.571,21.844 39.866,21.844 42.391,24.369 U7.32@42.454,24.369
USB_PORT1_D_N: D5.4 J4.2 | length 11.3
  Top Layer w0.147: J4.2@11.634,18.954 11.981,18.954 12.467,18.467 12.467,18.215 12.553,18.129 14.383,18.129 16.939,15.573 16.939,12.506 17.025,12.42 17.146,12.42 17.714,11.852 D5.4@17.714,11.542
USB_PORT1_D_P: D5.6 J4.3 | length 10.7
  Top Layer w0.147: J4.3@11.634,16.954 11.981,16.954 12.467,17.441 12.467,17.693 12.553,17.779 14.238,17.779 16.589,15.428 16.589,12.506 16.503,12.42 16.382,12.42 15.814,11.852 D5.6@15.814,11.542
USB_PORT2_D_N: D4.4 J5.A7 J5.B7 | length 5.5
  Top Layer w0.147: D4.4@48.453,9.794 48.453,8.951 48.778,8.626 48.778,6.553 48.864,6.467 49.698,6.467 49.784,6.553 49.784,7.551 J5.A7@49.778,7.557
USB_PORT2_D_P: D4.6 J5.A6 J5.B6 | length 4.3
  Top Layer w0.147: J5.A6@49.278,7.557 49.278,8.507 49.407,8.636 50.165,8.636 50.278,8.523 ; J5.B6@50.278,7.557 50.278,8.634 50.353,8.709 D4.6@50.353,9.794
USB_PORT3_D_N: D3.6 U4.13 | length 5.8
  Top Layer w0.147: D3.6@61.275,15.89 61.054,15.669 61.054,15.299 60.712,14.958 60.653,14.958 60.533,14.838 60.533,14.717 61.105,14.145 63.655,14.145 64.115,14.605 U4.13@64.415,14.605
USB_PORT3_D_P: D3.4 U4.14 | length 6.4
  Top Layer w0.147: D3.4@59.375,15.89 59.375,15.58 59.703,15.252 59.703,15.193 60.15,14.745 60.15,14.605 60.96,13.795 63.655,13.795 64.115,13.335 U4.14@64.415,13.335
USB_PORT4_D_N: D2.4 J6.2 | length 7.2
  Bottom Layer w0.147: D2.4@74.661,36.129 74.971,36.129 75.299,35.801 75.358,35.801 75.593,35.566 75.593,35.44 75.679,35.354 78.112,35.354 78.128,35.338 80.62,35.338 80.706,35.424 80.706,36.097 J6.2@80.772,36.163
USB_PORT4_D_P: D2.6 J6.3 | length 7.2
  Bottom Layer w0.147: D2.6@74.661,34.229 74.971,34.229 75.299,34.557 75.358,34.557 75.593,34.792 75.593,34.918 75.679,35.004 77.967,35.004 77.983,34.988 80.62,34.988 80.706,34.902 80.706,34.229 J6.3@80.772,34.163
VBUS_DET: R25.1 R26.2 U3.3 U7.27 | length 26.2
  Top Layer w0.143: R26.2@35.179,34.444 R25.1@33.401,34.444 v1(33.401,33.274) 33.488,33.187 33.488,32.933 39.485,26.936 40.672,26.936 40.814,27.079 40.897,27.079 U7.27@41.04,26.936
  Bottom Layer w0.143: U3.3@26.18,34.977 26.722,34.977 29.845,38.1 32.385,38.1 33.401,37.084 v1(33.401,33.274)
VIN_ESP1: C36.2 R29.1 R31.2 R34.2 U10.1 | length 24.5
  Bottom Layer w0.5: U10.1@65.59,22.185 65.955,22.185 66,22.23 66,22.626 66.618,23.244 66.618,24.058 C36.2@66.716,24.156 66.716,25.314 67.691,26.289 69.862,26.289 69.977,26.174 70.018,26.215 R29.1@72.05,26.215 73.861,26.215 74.998,25.078 74.998,19.626 73.405,18.033 R34.2@69.637,18.033
pads on no net: J1. J1.A5 J1.A6 J1.A7 J1.A8 J1.B5 J1.B6 J1.B7 J1.B8 J2.7 J2.8 J3. J5. J5.A8 J5.B8 J7.5 J7.6 J8.5 J8.6 J9.5 J9.6 U4.4 U4.5 U4.6 U4.7 U4.10 U4.11 U4.15 U4.16 U4.18 U4.19 U4.20 U4.21 U4.22 U4.23 U4.24 U4.25 U4.26 U4.28 U4.29 U4.30 U4.31 U4.32 U4.33 U4.34 U4.35 U4.38 U4.39

## Polygon pours and split planes (outlines as drawn)
GND on Bottom Layer "GND_L04_P004" (solid, remove dead copper, pour order 4): 2.05,4.05 cw(c2.05,6.05) 0.05,6.05 0.05,48.025 cw(c2.05,48.025) 2.05,50.025 14.051,50.025 14.051,56.025 31.038,56.025 31.038,50.025 90,50.025 cw(c90,48.025) 92,48.025 92,6.05 cw(c90,6.05) 90,4.05 64.448,4.05 64.448,0.05 23.05,0.05 23.05,4.05
"+5V HOST IN" on Bottom Layer "+5V_HOST_IN_L04_P000" (solid, pour order 0): 18.032,50.163 19.685,50.163 19.685,48.133 17.907,46.355 17.907,41.783 13.843,41.783 13.843,45.974
GND on Layer 2 "GND_L03_P003" (solid, remove dead copper, pour order 3): 2.05,4.05 cw(c2.05,6.05) 0.05,6.05 0.05,48.025 cw(c2.05,48.025) 2.05,50.025 14.051,50.025 14.051,56.025 31.038,56.025 31.038,50.025 90,50.025 cw(c90,48.025) 92,48.025 92,6.05 cw(c90,6.05) 90,4.05 64.448,4.05 64.448,0.05 23.05,0.05 23.05,4.05
GND on Top Layer "GND_L01_P005" (solid, remove dead copper, pour order 5): 2.05,4.05 cw(c2.05,6.05) 0.05,6.05 0.05,48.025 cw(c2.05,48.025) 2.05,50.025 14.051,50.025 14.051,56.025 31.038,56.025 31.038,50.025 90,50.025 cw(c90,48.025) 92,48.025 92,6.05 cw(c90,6.05) 90,4.05 64.448,4.05 64.448,0.05 23.05,0.05 23.05,4.05
GND on Layer 1 (split plane): 30.527,50.025 30.537,49.925 30.566,49.829 30.613,49.741 30.677,49.664 30.754,49.6 30.842,49.553 30.938,49.524 31.038,49.514 90,49.514 90.015,49.516 90.167,49.507 90.332,49.479 90.493,49.433 90.647,49.369 90.794,49.288 90.93,49.191 91.055,49.08 91.166,48.955 91.263,48.818 91.344,48.672 91.408,48.517 91.454,48.357 91.482,48.192 91.491,48.039 91.49,48.025 91.49,6.05 91.491,6.035 91.482,5.883 91.454,5.718 91.408,5.557 91.344,5.403 91.263,5.256 91.166,5.12 91.055,4.995 90.93,4.884 90.794,4.787 90.647,4.706 90.493,4.642 90.332,4.596 90.167,4.568 90.015,4.559 90,4.56 64.448,4.56 64.349,4.551 64.253,4.522 64.165,4.474 64.088,4.411 64.024,4.334 63.977,4.245 63.948,4.15 63.938,4.05 63.938,0.56 23.56,0.56 23.56,4.05 23.551,4.15 23.522,4.245 23.474,4.334 23.411,4.411 23.334,4.474 23.245,4.522 23.15,4.551 23.05,4.56 2.05,4.56 2.035,4.559 1.883,4.568 1.718,4.596 1.557,4.642 1.403,4.706 1.256,4.787 1.12,4.884 0.995,4.995 0.884,5.12 0.787,5.256 0.706,5.403 0.642,5.557 0.596,5.718 0.568,5.883 0.559,6.035 0.56,6.05 0.56,48.025 0.559,48.039 0.568,48.192 0.596,48.357 0.642,48.517 0.706,48.672 0.787,48.818 0.884,48.955 0.995,49.08 1.12,49.191 1.256,49.288 1.403,49.369 1.557,49.433 1.718,49.479 1.883,49.507 2.035,49.516 2.05,49.514 14.051,49.514 14.15,49.524 14.246,49.553 14.334,49.6 14.411,49.664 14.475,49.741 14.522,49.829 14.551,49.925 14.561,50.025 14.561,55.514 30.527,55.514

## Silkscreen, mask and mechanical layers (free items; w line width, h text height)
Top Overlay:
  circle w0.1: c3.01,47.121 r1.1
  circle w0.1: c88.9,47.121 r1.1
  circle w0.1: c35.778,3.052 r1.1
  circle w0.1: c3.01,7.01 r1.1
  circle w0.1: c88.9,7.01 r1.1
  lines w0.013: 14.155,36.969 14.155,49.169 76.155,49.169 76.155,36.969 14.155,36.969
  lines w0.1: 14.198,37.012 14.198,49.212 76.198,49.212 76.198,37.012 14.198,37.012
  text "EN" at 56.261,20.25 h0.9
  text "RST" at 74.295,6.28 h0.9
Board Layer Stack Bottom Overlay:
  text "+3V3" at 44.457,42.994 h0.9 r90
  text "SCL" at 45.727,42.994 h0.9 r90
  text "SDA" at 46.997,42.994 h0.9 r90
  text "GND" at 48.267,42.994 h0.9 r90
  text "+3V3" at 53.537,42.952 h0.9 r90
  text "SCL" at 54.807,42.952 h0.9 r90
  text "SDA" at 56.077,42.952 h0.9 r90
  text "GND" at 57.347,42.952 h0.9 r90
  text "+3V3" at 62.427,42.698 h0.9 r90
  text "S_EN" at 63.824,42.698 h0.9 r90
  text "S_AN" at 64.967,42.698 h0.9 r90
  text "GND" at 66.364,42.698 h0.9 r90
  text "+3V3" at 85.624,20.377 h0.9
  text "DTR" at 85.624,19.107 h0.9
  text "RTS" at 85.624,17.964 h0.9
  text "RX" at 85.624,16.567 h0.9
  text "TX" at 85.624,15.17 h0.9
  text "GND" at 85.624,13.9 h0.9
Mechanical 1:
  circle w0.013: c2.962,47.077 r1.1
Mechanical 13:
  the board outline again, w0.2